# Altium PCB BC20_PCB尺寸引脚图.PcbDoc
Units mm, origin at the board's own origin, x right, y up, seen from the top; angles counter-clockwise.
Board outline 152.4 x 101.6 mm, 2 copper layers (Top Layer, Bottom Layer); 2 components, 42 nets, 16 pads, 0 vias.
Unrouted connection lines stored in the file: 1.
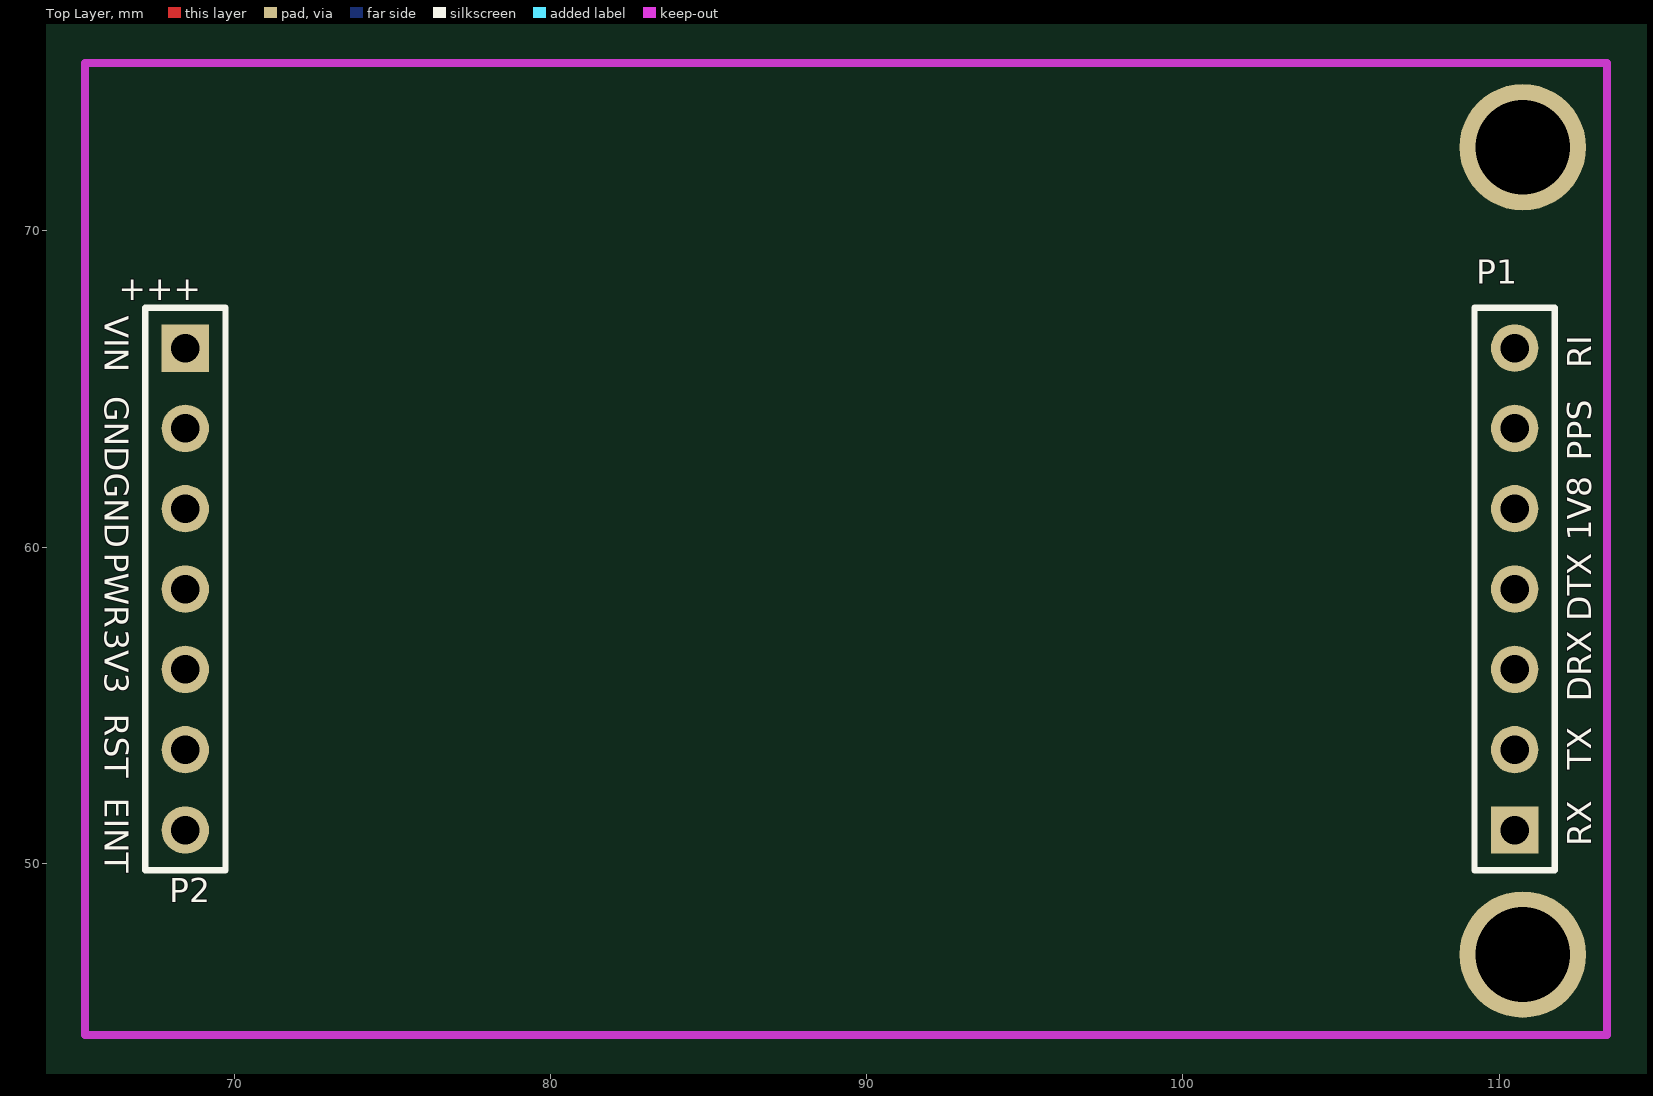
[diagram p0: Top Layer view]
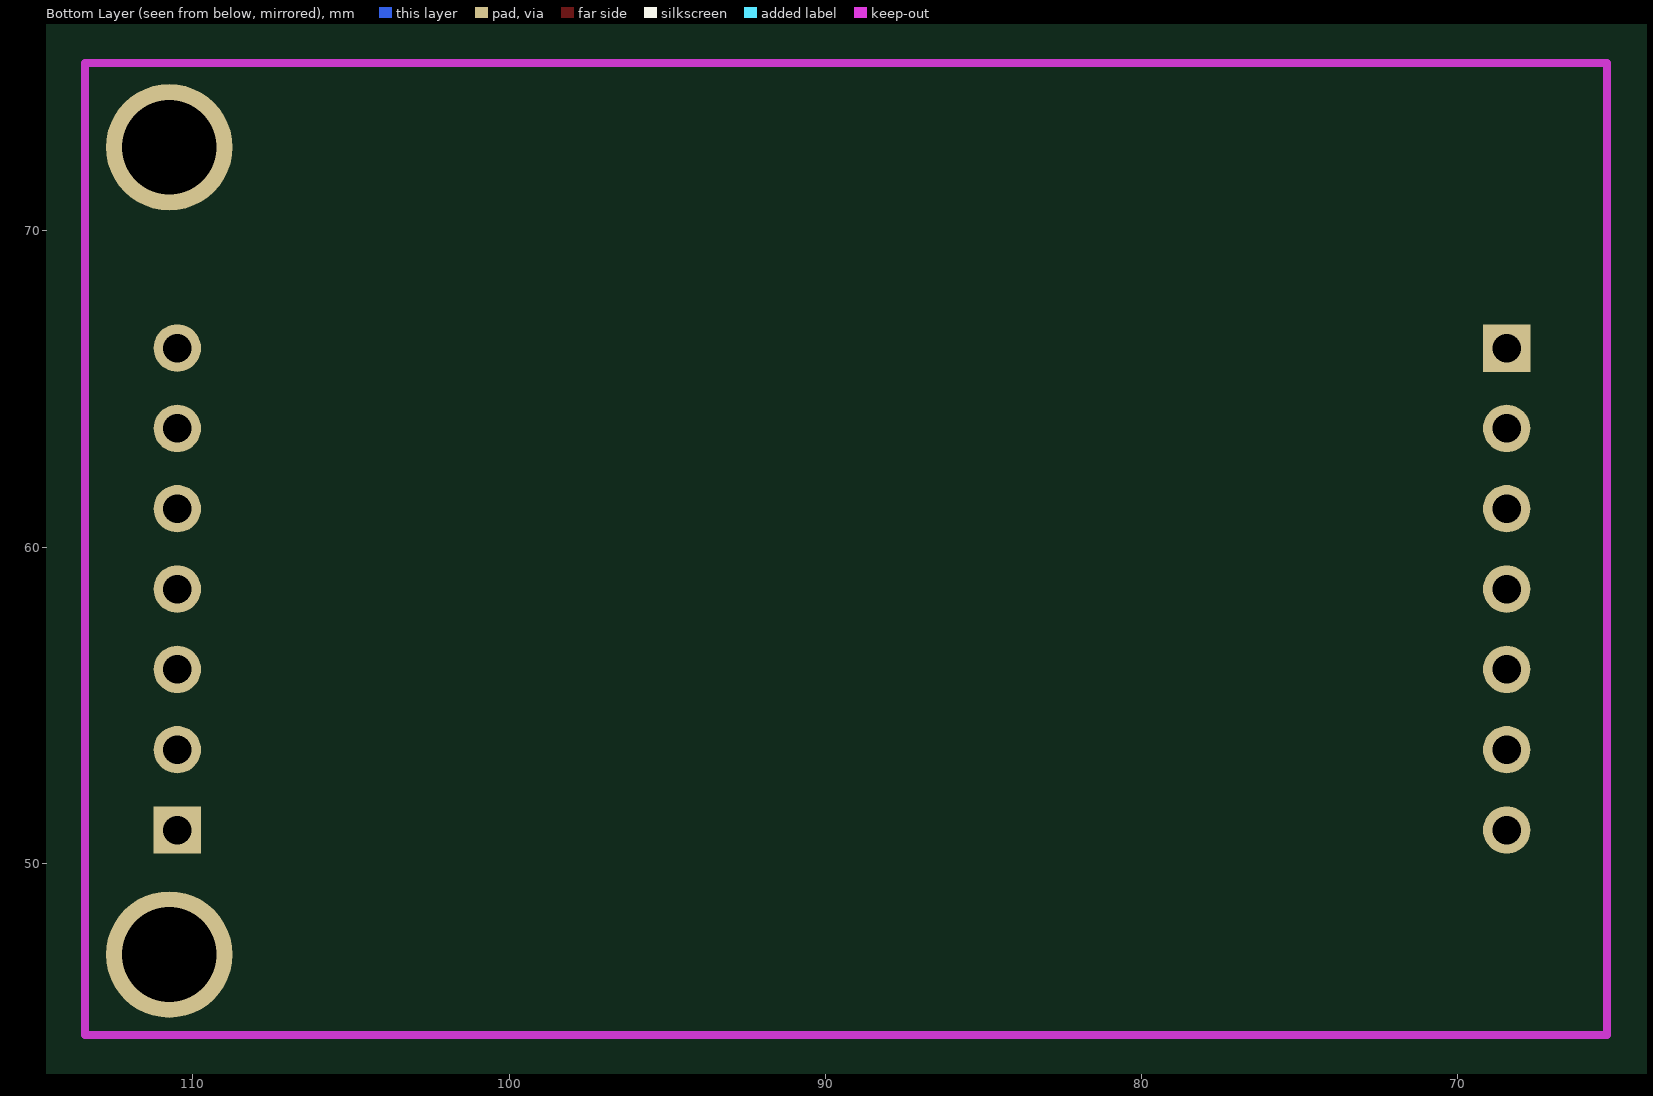
[diagram p1: Bottom Layer view, seen from below]

## Layer stack, top to bottom
Top Layer: signal copper 0.0356
Dielectric: dielectric 0.32, FR-4, Dk 4.8
Bottom Layer: signal copper 0.0356

## Board outline
25.4,25.4 177.8,25.4 177.8,127 25.4,127

## Design rules (kind name [scope] priority, off if disabled: settings)
Clearance [All] p1: gap=0.15
PlaneConnect [All] p1: planeconnectstyle=Direct reliefexpansion=0.508 reliefentries=4 reliefconductorwidth=0.254 reliefairgap=0.254
PolygonConnect [All] p1: connectstyle=Direct reliefconductorwidth=0.254 reliefentries=4 polygonreliefangle="90 Angle"
RoutingVias [All] p1: holewidth=0.711 width=1.27 viastyle="Through Hole" minholewidth=0.711 minwidth=1.27 maxholewidth=0.711 maxwidth=1.27
SilkscreenOverComponentPads [All] p1: minsilkscreentomaskgap=0.254
SolderMaskExpansion [All] p1: expansion=0.102
Width [All] p1: maxlimit=2.54 minlimit=0.254 preferedwidth=0.254 minimp=50.000000 maximp=50.000000 favimp=50.000000
26 further rules are at their usual default settings.

## Components (designator, comment, footprint, x,y, rotation, side; value= is the part's Value field where it differs from the comment)
P1 "Header 7" HDR1X7 110.49,51.054 r90 top
P2 "Header 7" HDR1X7 68.453,66.294 r270 top

## Footprints (in the part's own frame and the unit in brackets; to place one, negate y for a bottom-side part, rotate by r counter-clockwise, add the part's x,y. Pads: shape width x height; smd on the part's side, far side on the other; paste and mask are expansions set on the pad)
HDR1X7 [mm]
  rect 1.5x1.5 hole 0.9: 1(0,0)
  round 1.5 hole 0.9: 2(2.54,0) 3(5.08,0) 4(7.62,0) 5(10.16,0) 6(12.7,0) 7(15.24,0)
  silkscreen extent -1.27,-1.27 16.51,1.27

## Free pads (board coordinates)
  round 4 hole 3: 0(110.744,72.644) 1(110.744,47.117)

## Nets (pads, with @x,y where several pads share a name; then routed paths per layer and width w, separated by ;. In a path a pad name is that pad's centre, name@x,y a point inside that pad or via, vN(x,y) a via of type N, cw(c..) or ccw(c..) an arc to the next point about the centre after c; other vN are vias at no path point)
1PPS: 
1PPS_E: P1.6
3V3: P2.5
ENT: P2.7
GD: 
GND: P2.2 P2.3
NetC4_2: 
NetC6_2: 
NetC7_1: 
NetC10_2: 
NetD1_1: 
NetD1_2: 
NetJ1_1: 
NetJ2_1: 
NetL1_1: 
NetQ1_2: 
NetQ2_2: 
NetQ3_2: 
NetR10_2: 
NetR27_1: 
NetR28_1: 
PSM_ENT: 
PWR: P2.4
PWRKEY: 
RESET: 
RI: 
RI_E: P1.7
RST: P2.6
RXD: 
RXD_DBG: 
RXD_DBGE: P1.3
RXD_E: P1.1
SIM_CLK: 
SIM_DATA: 
SIM_RST: 
SIM_VCC: 
TXD: 
TXD_DBG: 
TXD_DBGE: P1.4
TXD_E: P1.2
VCC: P2.1
VDD_EXT: P1.5

## Keep-outs
Keep-Out Layer:
  lines w0.254: 65.278,44.577 65.278,75.311 113.411,75.311 113.411,44.577 65.278,44.577

## Silkscreen, mask and mechanical layers (free items; w line width, h text height)
Top Overlay:
  text "+++" at 68.961,68.453 h0.76 r180
  text "VIN" at 65.913,67.31 h0.76 r270
  text "RI" at 112.903,65.659 h0.76 r90
  text "GND" at 65.913,64.77 h0.76 r270
  text "PPS" at 112.903,62.738 h0.76 r90
  text "GND" at 65.913,62.357 h0.76 r270
  text "1V8" at 112.903,60.198 h0.76 r90
  text "PWR" at 65.913,59.817 h0.76 r270
  text "DTX" at 112.903,57.658 h0.76 r90
  text "3V3" at 65.913,57.404 h0.76 r270
  text "DRX" at 112.903,55.118 h0.76 r90
  text "RST" at 65.913,54.737 h0.76 r270
  text "TX" at 112.903,52.959 h0.76 r90
  text "EINT" at 65.913,52.07 h0.76 r270
  text "RX" at 112.903,50.546 h0.76 r90